# Allegro board BeagleBone-Battery-RevA-allegro.brd
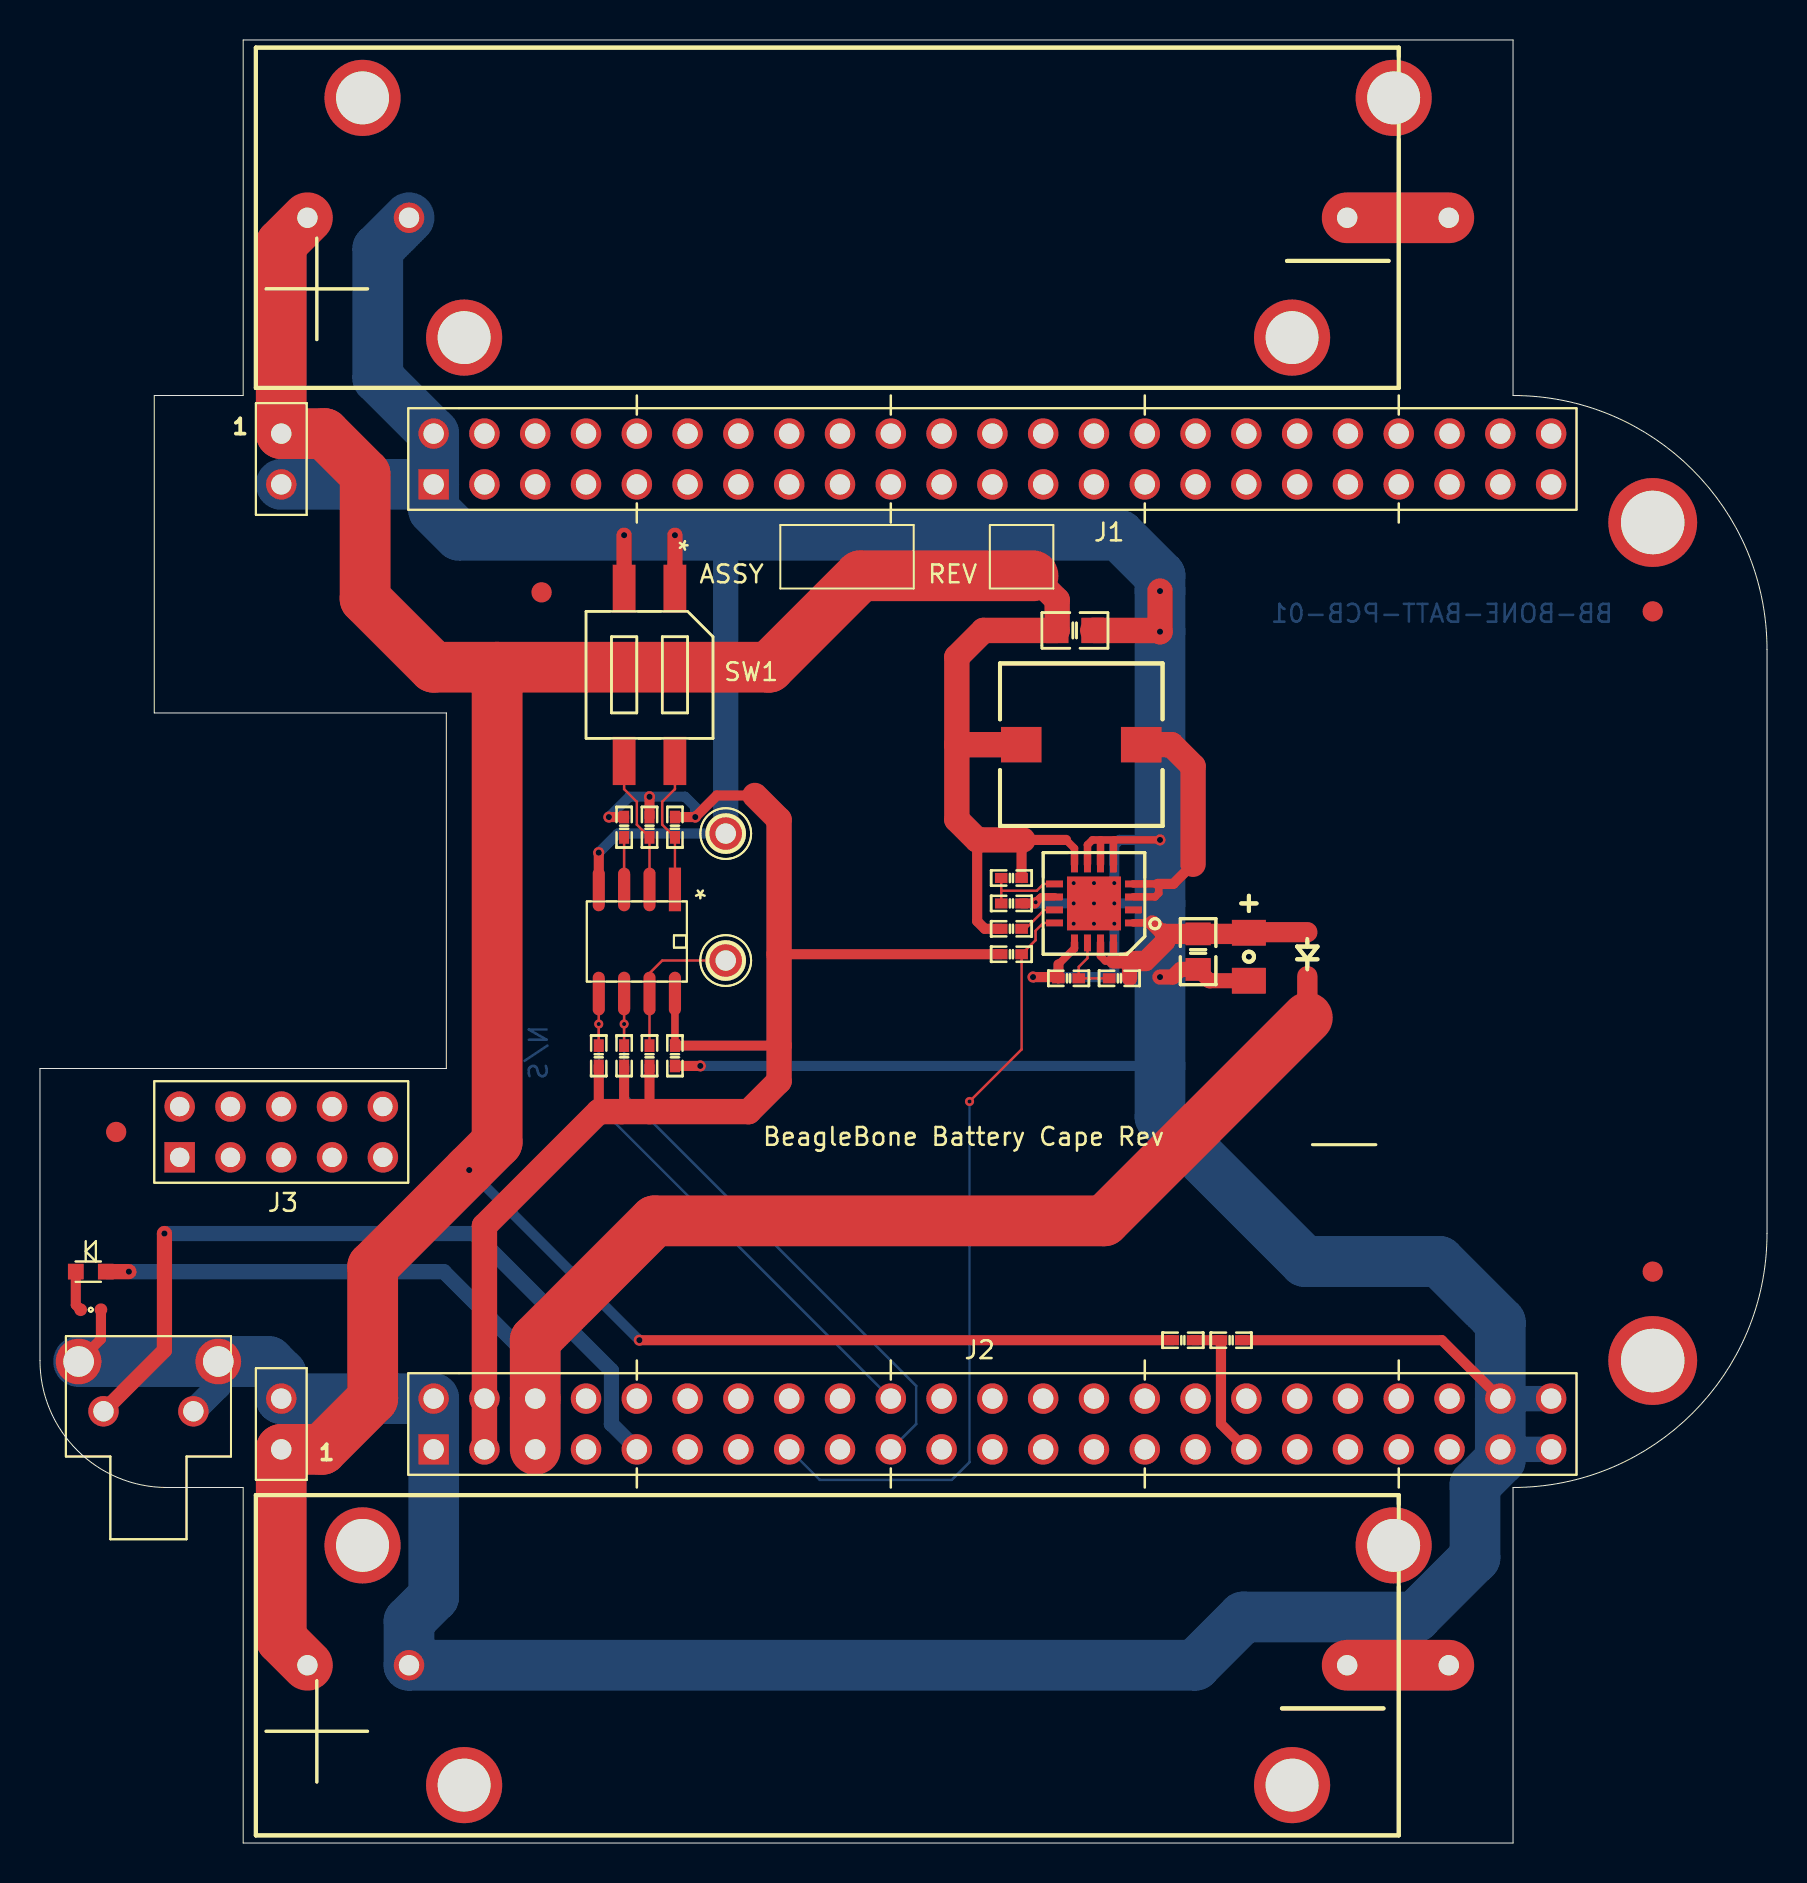
[diagram p0: board, top side]
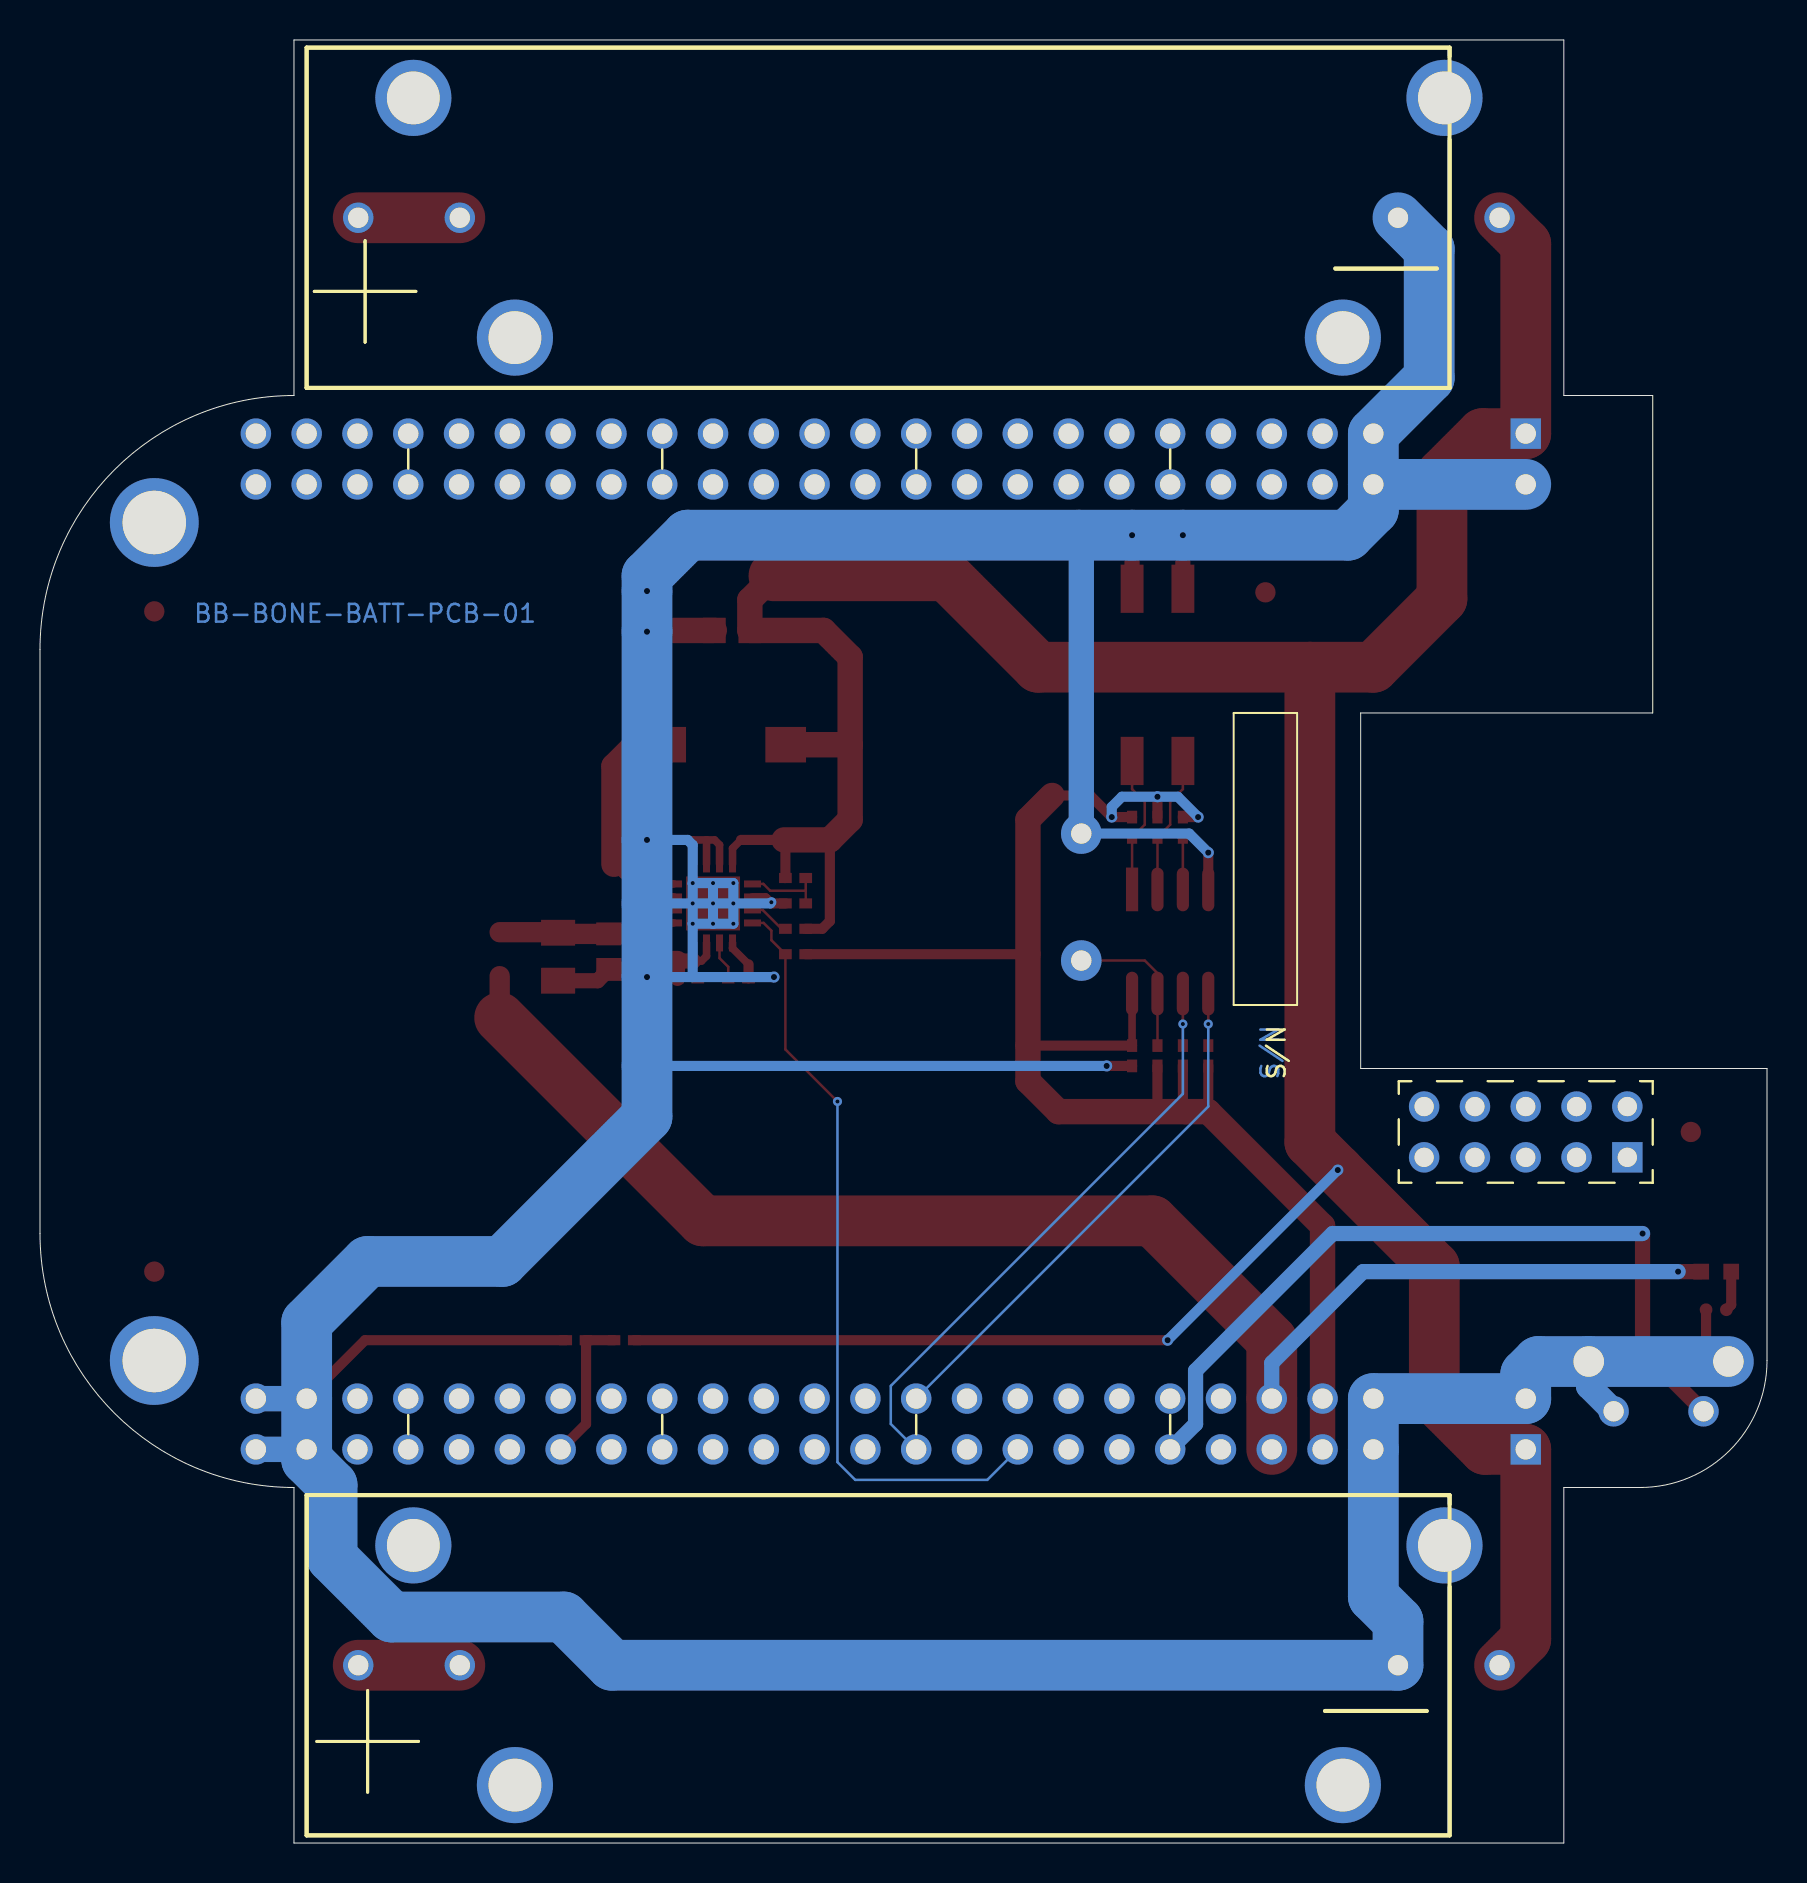
[diagram p1: board, bottom side, seen from below]

Outline 86.36 x 90.17 mm; copper layers: TOP, BOTTOM. Coordinates in mm from the lower left corner of the outline.
Outline path: 0,38.73 0,24.13 arc(1.86,19.64) 6.35,17.78 10.16,17.78 10.16,0 73.66,0 73.66,17.78 arc(82.64,21.5) 86.36,30.48 86.36,59.69 arc(82.64,68.67) 73.66,72.39 73.66,90.17 10.16,90.17 10.16,72.39 5.71,72.39 5.71,56.52 20.32,56.52 20.32,38.73 0,38.73

## Design rules (mm)
nets with their own width: min track width 0.508; nets DGND VDD_3V3 VDD_5V

## Placement (name value [footprint] x y rotation side)
C1  10uF,10V  [805]  57.91 44.58 90 top
C2  47uF, 10V  [3216]  60.45 44.32 270 top
C3  10uF,10V  [805]  51.75 60.64 180 top
C4  0.1uF  [402]  31.75 39.37 90 top
D1  PMEG1020EJ  [SOD-323F]  63.37 44.45 270 top
D2  LTST-C190GKT  [LED2-31SQ]  2.54 28.58 0 top
J1  MALE HEADER 2x23  [HEADER23X2]  19.68 67.94 0 top
J2  MALE HEADER 2x23  [HEADER23X2]  19.68 19.69 0 top
J3  MALE HDR5x2  [HEADER5X2]  6.99 34.29 90 top
J4  BH2AA-PC  [SIP2]  39.37 81.28 180 top
J5  BH2AA-PC  [SIP2]  44.45 81.28 0 bottom
J6  BH2AA-PC  [SIP2]  39.37 8.89 180 top
J7  BH2AA-PC  [SIP2]  44.45 8.89 0 bottom
J8  CON2  [B2S]  12.06 70.48 0 top
J9  CON2  [B2S]  12.06 19.69 180 top
L1  7447779006  [IND237SMD_287SQ]  52.07 54.93 0 top
NOREF  -  []  81.92 69.85 0 top
NOREF#2  -  []  -368.05 -238.51 0 top
NOREF#3  -  [unnamed#2]  80.64 66.04 90 top
NOREF#4  -  [unnamed#3]  80.64 28.58 270 top
NOREF#5  -  []  -368.17 -238.69 0 top
NOREF#6  -  [unnamed#3]  3.81 35.56 270 top
NOREF#7  -  [unnamed#2]  80.64 24.13 90 top
NOREF#8  -  []  1.84 19.66 0 top
NOREF#9  -  [unnamed#3]  25.08 62.55 270 top
NOREF#10  -  [unnamed#3]  80.64 61.59 270 top
R1  200K  [0402]  57.15 25.15 180 top
R2  100K  [0402]  59.56 25.15 180 top
R4  0, DNI  [0402]  53.98 43.24 180 top
R5  2M  [0402]  48.58 48.26 0 top
R6  10K  [0402]  48.58 45.72 0 top
R7  1M  [0402]  48.58 44.45 0 top
R8  390K  [0402]  48.58 46.99 180 top
R9  0, DNI  [0402]  51.44 43.24 180 top
R10  1K  [R402-25]  2.54 26.67 180 top
R12  5.6K,5%  [402]  29.21 39.37 90 top
R13  5.6K,5%  [402]  27.94 39.37 90 top
R14  4.75K  [402]  29.21 50.8 270 top
R15  4.75K  [402]  30.48 50.8 270 top
R16  4.75K  [402]  31.75 50.8 270 top
R17  10K  [402]  30.48 39.37 90 top
S6  B3F-3100  [SW4-B3F-315X]  3.17 21.59 0 top
SW1  SW DIP-2  [SWDIP4_100-339SMD]  30.48 58.42 270 top
TP1  T POINT A  [TP1-8040]  34.29 44.13 0 top
TP2  T POINT A  [TP1-8040]  34.29 50.48 0 top
U1  TPS61032RSA  [QFN16_RSA]  52.7 46.99 90 top
U2  CAT24C256W  [SOIC_8]  29.84 45.09 180 top

## Library data of the parts
C1 C3 = CAP_10uF_Y5V_10V_10%_0805
C2 = CAPACITOR POL: Tolerance: X; User Part Number: X
C4 = CAP,0.1uF
D1 = DIODE SCHOTTKY_0
D2 = LED_LTST-C150GKT: Tolerance: X; User Part Number: X
J1 J2 = HDR_46_F_2_0.1_0.1
J3 = HDR_10_F_2_0.1
J4-J7 = CON2
J8 J9 = CON2: Tolerance: X; User Part Number: X
L1 = INDUCTOR FERRITE/SM: Tolerance: TOLERANCE; User Part Number: USERPART#
R1 R2 R4-R9 = RES_330_0402
R10 = RES_330_0402: Tolerance: TOLERANCE; User Part Number: USERPART#
R12 R13 = RES_470_1/10W_5%_0402
R14-R17 = RES_4.7K_0402
S6 = SW_KT11P2JM_4: User Part Number: X; Tolerance: X
SW1 = SW DIP-2
TP1 TP2 = T POINT A
U1 = TPS61032RSA_1
U2 = CAT24C256W

## Footprints (pads in the part's own frame, mm; a bottom-side part is the same pattern mirrored in y, then rotated)
0402
  rect 0.635x0.508 smd: 1(-0.508,0) 2(0.508,0)
402
  rect 0.635x0.508 smd: 1(-0.508,0) 2(0.508,0)
805
  rect 1.143x1.27 smd: 1(-0.889,0) 2(0.889,0)
3216
  rect 1.295x1.702 smd: 1(-1.2,0) 2(1.2,0)
B2S
  rect 1.524x1.524 hole 1.016: 1(0,0)
  round 1.524 hole 1.016: 2(0,-2.54)
HEADER5X2
  rect 1.524x1.524 hole 0.965: 1(0,0)
  round 1.524 hole 0.965: 2(2.54,0) 3(0,-2.54) 4(2.54,-2.54) 5(0,-5.08) 6(2.54,-5.08) 7(0,-7.62) 8(2.54,-7.62) 9(0,-10.16) 10(2.54,-10.16)
HEADER23X2
  rect 1.524x1.524 hole 1.016: 1(0,0)
  round 1.524 hole 1.016: 2(0,2.54) 3(2.54,0) 4(2.54,2.54) 5(5.08,0) 6(5.08,2.54) 7(7.62,0) 8(7.62,2.54) 9(10.16,0) 10(10.16,2.54) 11(12.7,0) 12(12.7,2.54) 13(15.24,0) 14(15.24,2.54) 15(17.78,0) 16(17.78,2.54) 17(20.32,0) 18(20.32,2.54) 19(22.86,0) 20(22.86,2.54) 21(25.4,0) 22(25.4,2.54) 23(27.94,0) 24(27.94,2.54) 25(30.48,0) 26(30.48,2.54) 27(33.02,0) 28(33.02,2.54) 29(35.56,0) 30(35.56,2.54) 31(38.1,0) 32(38.1,2.54) 33(40.64,0) 34(40.64,2.54) 35(43.18,0) 36(43.18,2.54) 37(45.72,0) 38(45.72,2.54) 39(48.26,0) 40(48.26,2.54) 41(50.8,0) 42(50.8,2.54) 43(53.34,0) 44(53.34,2.54) 45(55.88,0) 46(55.88,2.54)
IND237SMD_287SQ
  rect 2.032x1.778 smd: 1(-3,0) 2(3,0)
LED2-31SQ
  rect 0.787x0.787 smd: 1(-0.749,0) 2(0.749,0)
QFN16_RSA
  rect 0.35x0.85 smd: 1(-0.975,-1.975) 2(-0.325,-1.975) 3(0.325,-1.975) 4(0.975,-1.975) 9(0.975,1.975) 10(0.325,1.975) 11(-0.325,1.975) 12(-0.975,1.975)
  rect 0.85x0.35 smd: 5(1.975,-0.975) 6(1.975,-0.325) 7(1.975,0.325) 8(1.975,0.975) 13(-1.975,0.975) 14(-1.975,0.325) 15(-1.975,-0.325) 16(-1.975,-0.975)
  rect 2.7x2.7 smd: 17(0,0)
R402-25
  round 0.635 smd: 1(-0.508,0) 2(0.508,0)
SIP2
  round 3.81 hole 2.642: (-23.241,5.994) (23.241,-5.994)
  round 1.524 hole 1.016: 1(25.997,0) 2(-25.997,0)
SOD-323F
  rect 0.6x0.6 smd: 1(1.1,0) 2(-1.1,0)
SOIC_8
  rect 0.61x2.184 smd: 1(-1.905,-2.603)
  oval 0.61x2.184 smd: 2(-0.635,-2.603) 3(0.635,-2.603) 4(1.905,-2.603) 5(1.905,2.603) 6(0.635,2.603) 7(-0.635,2.603) 8(-1.905,2.603)
SW4-B3F-315X
  round 1.524 hole 1.016: 1(0,0) 2(4.496,0)
  round 2.286 hole 1.524: 3(-1.245,2.489) 4(5.74,2.489)
SWDIP4_100-339SMD
  rect 2.413x1.143 smd: 1(-4.305,1.27) 2(-4.305,-1.27) 3(4.305,-1.27) 4(4.305,1.27)
TP1-8040
  round 2.032 hole 1.016: 1(0,0)
unnamed#2
  round 4.445 hole 3.175: 1(0,0)
unnamed#3
  round 1.016 smd: 1(0,0)

## Nets
DGND: C1.1 C2.2 C3.1 C4.1 J1.1 J1.2(26) J2.1 J2.2(26) J2.43(22) J2.44(47) J2.45(23) J2.46(48) J5.2 J7.2 J8.2 J9.2 R2.1 R8.1 R9.2 R10.1 S6.2(A2) S6.3(B1) S6.4(B2) SW1.1(A1) SW1.2(A2) TP2.1(TP) U1.5(PGND1) U1.6(PGND2) U1.7(PGND3) U1.10(SYNC) U1.13(GND) U1.17(PAD) U2.4(VSS)
VBAT: C3.2 J4.1 J6.1 J8.1 J9.1 L1.1 R1.2 R5.2 R6.1 U1.8(VBAT)
VDD_3V3: C4.2 J2.3(2) J2.4(27) R7.1 R12.1 R13.1 R14.1 R15.1 R16.1 R17.1 U2.8(VCC)
VDD_5V: D1.1(CATHODE) D2.2(A) J2.5(3) J2.6(28)
AIN4: J2.33(17) R1.1 R2.2
GPIO1_16: J2.15(8) R7.2 U1.12(LBO)
I2C2_SCL: J2.19(10) R12.2 U2.6(SCL)
I2C2_SDA: J2.20(35) R13.2 U2.5(SDA)
PWR_BUT: J2.9(5) S6.1(A1)
SW1_A0: R16.2 SW1.4(B1) U2.1(A0)
SW1_A1: R15.2 SW1.3(B2) U2.2(A1)
SW1_A3: R14.2 U2.3(A2)
N17101594: R4.2 R9.1 U1.14(FB)
N17101621: C1.2 C2.1 D1.2(ANODE) R4.1 U1.1(VOUT1) U1.15(VOUT2) U1.16(VOUT3)
N17101637: L1.2 U1.3(SW1) U1.4(SW2)
N17101693: R5.1 R8.2 U1.9(LBI)
N17101809: R6.2 U1.11(EN)
N17102365: J4.2 J5.1
N17103656: R17.2 TP1.1(TP) U2.7(WP)
N17106363: D2.1(C) R10.2
N17107516: J6.2 J7.1

Pads without a net: J1 3 4 5 6 7 8 9 10 11 12 13 14 15 16 17 18 19 20 21 22 23 24 25 26 27 28 29 30 31 32 33 34 35 36 37 38 39 40 41 42 43 44 45 46; J2 7 8 10 11 12 13 14 16 17 18 21 22 23 24 25 26 27 28 29 30 31 32 34 35 36 37 38 39 40 41 42; J3 1 2 3 4 5 6 7 8 9 10; NOREF#3 1; NOREF#4 1; NOREF#6 1; NOREF#7 1; NOREF#9 1; NOREF#10 1; U1 2

## Via types
v1: diameter 0.559, hole 0.305, TOP to BOTTOM, 16 vias
v2: diameter 0.457, hole 0.203, TOP to BOTTOM, 13 vias

## Routing (per net, layer and track width the routed paths; a pad name or vN(x,y) marks a point on that pad's centre or on a via; arc(x,y) is an arc through that point)
DGND: length 341.7
  TOP w0.381: 53.72,50.16 53.68,50.12 U1.5 ; 53.72,50.16 53.03,50.16 ; 53.72,50.16 v1(56.01,50.16) ; 53.03,50.16 52.63,50.16 52.38,49.92 U1.7 ; 53.03,50.16 U1.6 ; U1.13 51.73,44.74 50.93,43.94 ; U1.10 50.07,47.32 50,47.25 49.99,47.25 v2(49.79,47.05)
  TOP w0.508: S6.3 3.05,25.2 R10.1 ; v2(49.79,47.05) 49.73,46.99 R8.1 ; 50.93,43.94 R9.2 50.86,43.31 v1(49.66,43.31) ; C4.1 v1(33.02,38.86) ; U2.4 v1(27.94,49.53) ; J2.44 70.1,25.15 R2.1
  TOP w0.762: C2.2 58.48,43.12 C1.1 57.02,43.69 56.64,43.31 v1(56.01,43.31) ; SW1.2 v1(29.21,65.41) ; SW1.1 v1(31.75,65.41)
  TOP w1.27: C3.1 55.94,60.64 v1(56.01,60.58) v1(56.01,62.61)
  BOTTOM w0.508: v2(52.7,45.97) v2(51.69,45.97) v2(51.69,46.99) ; v2(52.7,45.97) v2(53.72,45.97) ; v2(52.7,45.97) v2(52.7,46.99) ; v2(52.7,46.99) v2(53.72,46.99) ; v2(52.7,46.99) v2(51.69,46.99) ; v2(52.7,46.99) v2(52.7,48.01) ; v2(53.72,46.99) v2(53.72,48.01) ; v2(53.72,46.99) 56.01,46.99 ; v2(53.72,46.99) v2(53.72,45.97) ; v1(56.01,50.16) 53.98,50.16 53.72,49.91 v2(53.72,48.01) ; v2(53.72,45.97) 53.72,43.31 ; 53.72,43.31 v1(56.01,43.31) ; 53.72,43.31 v1(49.66,43.31) ; v2(53.72,48.01) v2(52.7,48.01) ; v2(52.7,48.01) v2(51.69,48.01) v2(51.69,46.99) ; v1(27.94,49.53) 28.89,50.48 TP2.1 ; v2(51.69,46.99) 49.85,46.99 v2(49.79,47.05) ; 56.01,38.86 v1(33.02,38.86)
  BOTTOM w1.27: S6.2 8.92,22.83 S6.4 ; TP2.1 34.29,65.28 34.42,65.41 ; J2.45 J2.43 ; J2.46 J2.44
  BOTTOM w2.54: J1.1 J1.2 16.89,73.28 16.89,79.72 J5.2 ; J1.1 19.68,66.68 20.95,65.41 v1(29.21,65.41) v1(31.75,65.41) 53.98,65.41 56.01,63.37 v1(56.01,62.61) v1(56.01,60.58) v1(56.01,50.16) v1(56.01,43.31) 56.01,36.32 63.25,29.08 69.98,29.08 73.03,26.04 J2.44 J2.43 73.03,19.17 71.75,17.9 71.75,14.28 68.78,11.3 60.17,11.3 57.76,8.89 J7.2 18.45,11.09 19.68,12.32 J2.1 J2.2 J9.2 12.06,23.44 11.43,24.08 S6.4 S6.3 ; J1.1 J8.2
VBAT: length 188.9
  TOP w0.381: U1.8 51.73,49.74 51.31,50.16
  TOP w0.508: R6.1 47.24,45.72 46.86,46.1 46.86,50.16 ; R5.2 49.09,50.1 49.15,50.16 51.31,50.16 ; R1.2 v1(29.97,25.15)
  TOP w1.27: 45.85,54.93 45.85,59.31 47.18,60.64 C3.2 50.86,62.17 49.66,63.37 ; 45.85,54.93 L1.1 ; 45.85,54.93 45.85,51.18 46.86,50.16 49.15,50.16
  TOP w2.54: 22.86,58.8 22.86,35.05 v1(21.46,33.66) 16.64,28.83 16.64,22.23 14.1,19.69 J9.1 12.06,10.2 J6.1 ; 22.86,58.8 36.45,58.8 41.02,63.37 49.66,63.37 ; 22.86,58.8 19.68,58.8 16.26,62.23 16.26,68.45 14.22,70.48 J8.1 12.06,79.97 J4.1
  BOTTOM w0.508: v1(29.97,25.15) v1(21.46,33.66)
VDD_3V3: length 81.2
  TOP w0.381: U2.8 C4.2
  TOP w0.508: R13.1 27.94,36.58 ; R7.1 36.96,44.45 ; v1(30.48,52.32) R15.1 ; R17.1 30.48,36.58 ; 35.75,52.39 33.85,52.39 v1(32.77,51.31) R16.1 ; C4.2 36.96,39.88 ; R12.1 29.21,36.7 29.08,36.58 ; R14.1 v1(28.45,51.31)
  TOP w1.27: J2.3 J2.4 22.23,30.86 27.94,36.58 35.43,36.58 36.96,38.1 36.96,51.18 35.75,52.39
  BOTTOM w0.508: v1(32.77,51.31) 32.77,51.82 32.26,52.32 v1(30.48,52.32) 29.46,52.32 v1(28.45,51.31)
VDD_5V: length 78
  TOP w0.762: v1(4.45,28.58) D2.2
  TOP w1.016: D1.1 63.37,41.28
  TOP w2.54: J2.5 J2.6 24.77,25.15 30.73,31.12 53.21,31.12 63.37,41.28
  BOTTOM w0.762: J2.6 24.77,24 20.19,28.58 v1(4.45,28.58)
AIN4: length 7.4
  TOP w0.508: J2.33 59.05,20.96 R2.2 R1.1
GPIO1_16: length 39.1
  TOP w0.127: v2(46.48,37.08) 49.09,39.69 R7.2 49.78,45.15 49.78,45.62 50.18,46.01 U1.12
  BOTTOM w0.127: v2(46.48,37.08) 46.48,19.05 45.59,18.16 38.99,18.16 J2.15
I2C2_SCL: length 30.5
  TOP w0.127: U2.6 v2(29.21,40.96) R12.2
  BOTTOM w0.127: J2.19 43.81,20.96 43.81,22.86 29.21,37.47 v2(29.21,40.96)
I2C2_SDA: length 27.4
  TOP w0.127: U2.5 v2(27.94,40.96) R13.2
  BOTTOM w0.127: J2.20 27.94,36.83 v2(27.94,40.96)
PWR_BUT: length 39.8
  TOP w0.762: v1(6.22,30.48) 6.22,24.64 S6.1
  BOTTOM w0.762: v1(6.22,30.48) 21.72,30.48 28.57,23.62 28.57,20.96 J2.9
SW1_A0: length 7
  TOP w0.127: SW1.4 31.75,52.7 31.11,52.07 31.11,50.93 R16.2 U2.1
SW1_A1: length 7
  TOP w0.127: U2.2 R15.2 29.84,50.93 29.84,52.07 29.21,52.7 SW1.3
SW1_A3: length 2.6
  TOP w0.127: U2.3 R14.2
N17101594: length 3.5
  TOP w0.127: R4.2 R9.1 51.94,43.81 52.38,44.25 U1.14
N17101621: length 15.5
  TOP w0.381: U1.15 53.03,44.36 53.28,44.11 53.68,44.11 U1.16 ; U1.1 55.63,46.01
  TOP w0.762: 53.68,44.11 54.48,44.11 R4.1 ; 60.48,45.55 C2.1 60.4,45.47 ; 56.26,45.47 56.17,45.47 55.63,46.01
  TOP w1.016: 54.48,44.11 55.29,44.11 56.26,45.09 56.26,45.47 C1.2 60.4,45.47 ; D1.2 60.48,45.55
N17101637: length 13.1
  TOP w0.381: U1.4 55.88,47.97 ; U1.3 55.76,47.32 55.94,47.5 55.94,47.97
  TOP w0.508: 57.66,48.95 56.67,47.97 55.88,47.97
  TOP w1.27: L1.2 56.58,54.93 57.66,53.85 57.66,48.95
N17101693: length 4.1
  TOP w0.121: 48.07,47.63 R8.2
  TOP w0.127: U1.9 50.19,47.97 49.85,47.62 48.07,47.62 48.07,47.63 R5.1
N17101809: length 2
  TOP w0.127: U1.11 50.22,46.66 49.28,45.72 R6.2
N17102365: length 5.1
  TOP w2.54: J4.2 J5.1
N17103656: length 7.7
  TOP w0.127: R17.2 U2.7 30.48,43.5 31.11,44.13 TP1.1
N17106363: length 2
  TOP w0.508: D2.1 1.79,26.91 R10.2
N17107516: length 5.1
  TOP w2.54: J6.2 J7.1

## Text on the board
BOTTOM: BB-BONE-BATT-PCB-01 | S/N | LAYER 2 | SOLDER
Board Geometry/Soldermask Bottom: SMS
Ref Des/Silkscreen Bottom: S/N | BSLK
User.Comments: D2 | D3 | D4 | D5 | S1 | USER LEDS | D1 | RESET | TP16 | C101 | 0 | 1 | 2 | 3 | TP10 | TP11 | TP12 | TP13 | R96 | R97 | R98 | R99 | C100 | FB4 | C144 | R160 | C137 | C145 | U3 | U1 | TP7 | 10 | 9 | 22 | 28 | 21 | TP15 | L1 | 15 | 7 | 14 | 8 | Y4 | FB5 | TP9 | R158 | R154 | C146 | R136 | Q2 | L2 | Q1 | U16 | U14 | U17 | U4 | L3 | R181 | R187 | C51 | C52 | 48 | TP4 | 18 | 16 | R78 | 33 | 32 | Y1 | V | A | TP3 | TP1 | R69 | R68 | R47 | R46 | R67 | R59 | R72 | R71 | R54 | R53 | R52 | R70 | R25 | R63 | R73 | R64 | R38 | R42 | R34 | R61 | R60 | R36 | R76 | C116 | R | C133 | TP18 | C109 | C110 | C111 | C112 | C113 | C89 | 46 | 45 | C114 | C115 | C117 | C159 | R193 | C160 | PWR | TP19 | R27 | R23 | R155 | R159 | C136 | R156 | R161 | TP8 | R132 | R123 | R137 | R121 | R125 | R188 | R173 | R127 | R174 | TP17 | C163 | 64 | 49 | C162 | C27 | R24 | R21 | C26 | C30 | C29 | C28 | C67 | R95 | R94 | R91 | C87 | 17 | R93 | R22 | R90 | TP6 | R92 | R89 | R88 | R87 | TP5 | R86 | R85 | R176 | R79 | R43 | R84 | R83 | R66 | R82 | R32 | R81 | R31 | R80 | C68 | R194 | R190 | R195 | R191 | R192 | P5 | P6 | U11 | U8 | U2 | U12 | U5 | AM335x | ASSY | REV | U6 | P2 | P8 | P9 | USB Host | USB | Ethernet | P10 | microSD Card | (OZ) | LAYER 1 - PRIMARY SIDE - SIGNAL | LAYER 2 - GROUND PLANE | LAYER 3 - SIGNAL | LAYER 4 - SIGNAL | LAYER 5 - SPLIT POWER PLANE | LAYER 6 - SECONDARY SIDE - SIGNAL | LAYER# | COPPER WEIGHT | HALF+PLATING | IMPEDANCE CONTROL | +/- 10% | 50ohm SINGLE ENDED | TRACE WIDTH | TRACE WIDTH / SPACE | 90ohm DIFFERENTIAL | 100ohm DIFFERENTIAL | RevA | 5.25 | 4.75 | 4.5/6.5 | 5.0/7.0 | 3.75/7.25 | 4.00/8.00 | LAYER STACK-UP - ALL DIMENSIONS IN INCHES
TOP: LAYER 1 | COMPONENT
Board Geometry/Soldermask Top: SMC
Ref Des/Silkscreen Top: ASSY | BeagleBone Battery Cape Rev | REV | TSLK
DIMENSION: (OZ) | LAYER 1 - PRIMARY SIDE | LAYER 2 - SECONDARY SIDE | LAYER# | COPPER WEIGHT | HALF+PLATING | TRACE WIDTH | 10. ALL VIAS TO HAVE SOLDERMASK. | 9. PLATED THROUGH SLOT INDICATED WITH MULTIPLE DRILL HITS SHOULD BE | FINISHED AS SMOOTH WALL BY VEDOR. | PROCESS NOTES: | 2. APPLY LPI SOLDERMASK OVER BARE COPPER (SMOBC), | COLOR: BONE OR OFF WHITE. SOLDERMASK SHALL | CONFORM TO IPC-SM-840, CLASS H. CURRENT REV. | 3. SOLDERMASK ARTWORK HAS ZERO (0) OVERSIZED PADS. | FABRICATION VENDOR IS ALLOWED TO ADJUST THE COMPONENT | SOLDERMASK PADS TO MEET THEIR TOOLING REQUIREMENTS. | 4. APPLY LPI SILKSCREEN OR EQUIVALENT PER THE ARTWORK. | COLOR: BLACK. | 1. PLATE ALL EXPOSED AREAS WITH ELECTROLESS | IMMERSION GOLD, NICKEL 150 MICROINCHES THK MIN | GOLD 5-15 MICROINCHES THK MIN. | SUPPLIED IPC-D-356 NETLIST. | FAB NOTES: | 1. ALL DIMENSIONS ARE IN INCHES, UNLESS | OTHERWISE NOTED. | 2. THE PWB SHALL BE FABRICATED TO IPC-6012, | CLASS 2 AND WORKMANSHIP SHALL CONFORM TO | IPC-A-600, CLASS 2. CURRENT REVISIONS. | 3. BOARD MATERIAL SHALL BE 180 Tg/350 Td ISOLA FR-370HR | OR EQUIVALENT, RoHS COMPLIANT AND LEAD FREE | ASSEMBLY CAPABLE.  BOARD MATERIAL SHALL | MEET OR EXCEED IPC-4101B. COLOR: NATURAL. | 4. BOARD MATERIAL & CONSTRUCTION TO BE U.L. | APPROVED AND MARKED ON THE FINISHED BOARD. | 5. MINIMUM COPPER WALL THICKNESS OF PLATED-THRU | HOLES TO BE .001 INCH, WITH A MINIMUM | ANNULAR RING OF .002 INCH. | 6. OVERALL BOARD THICKNESS TO BE .062 +/- 10% | AND APPLIES AFTER ALL LAMINATION AND PLATING | PROCESSES, MEASURED FROM COPPER TO COPPER. | 7. MAX. WARP & TWIST TO BE .0075 INCHES PER INCH. | 8. BOARD MUST BE ELECTRICALLY TESTED USING | 5.00 | R.250 | LAYER STACK-UP - ALL DIMENSIONS IN INCHES
DISPLAY_TOP: 1 | SPC
USER_PART_NUM_TOP: TSLKC
USER_PART_NUM_BOTTOM: BSLKC
DISPLAY_BOTTOM: SPS
User.9: DATE | DESIGN ENGR | PROJECT ENGR | ENGR MGR | NEXT ASSEMBLY | APPROVED | CHECKED | DRAFTING | ENGR | NONE | 1 OF 1
User.10: DATE | DESIGN ENGR | PROJECT ENGR | ENGR MGR | NEXT ASSEMBLY | APPROVED | CHECKED | DRAFTING | ENGR | 1 OF 1
User.11: NONE
User.27: FIGURE | 8.0 | 12.0 | 38.0 | 40.0 | 60.0 | 104.0 | 125.0 | SIZE | DRILL CHART: TOP to BOTTOM | ALL UNITS ARE IN MILS | +3.0/-3.0 | +0.0/-0.0 | TOLERANCE | PLATED | 13 | 16 | 10 | 2 | 92 | 12 | 8 | QTY
